# Altium PCB PCB1.PcbDoc
Units mm, origin at the board's own origin, x right, y up, seen from the top; angles counter-clockwise.
Board outline 227.36 x 30 mm, 2 copper layers (Top Layer, Bottom Layer), stack 1.569 mm thick; 50 components, 57 nets, 198 pads, 235 vias.
Unrouted connection lines stored in the file: 1.
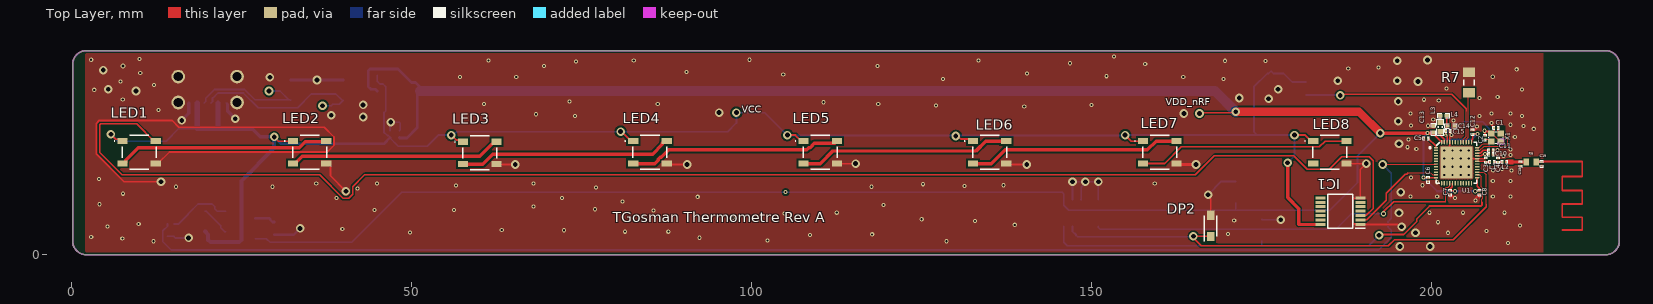
[diagram p0: Top Layer view]
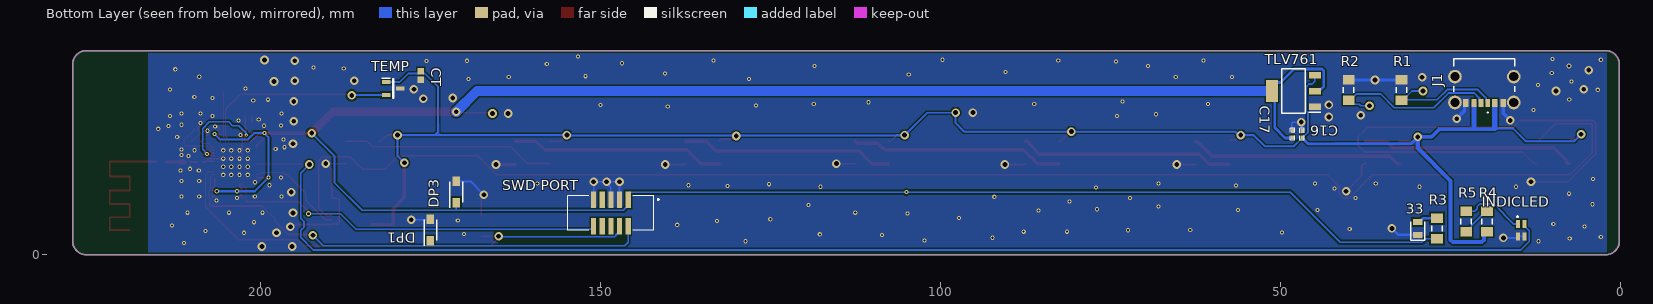
[diagram p1: Bottom Layer view, seen from below]
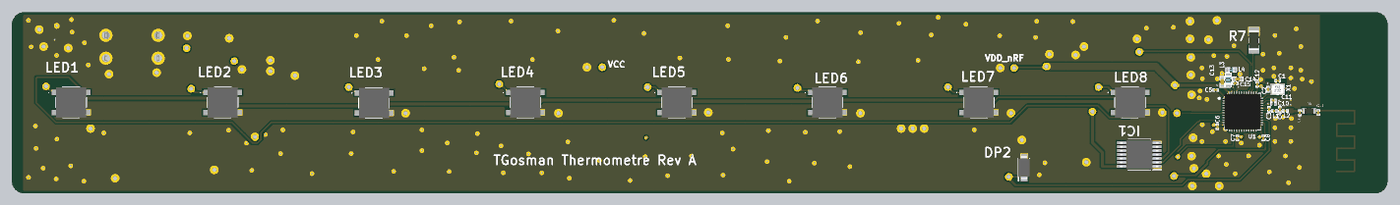
[diagram p2: 3D render of the assembled board from above, using the file's embedded part models]
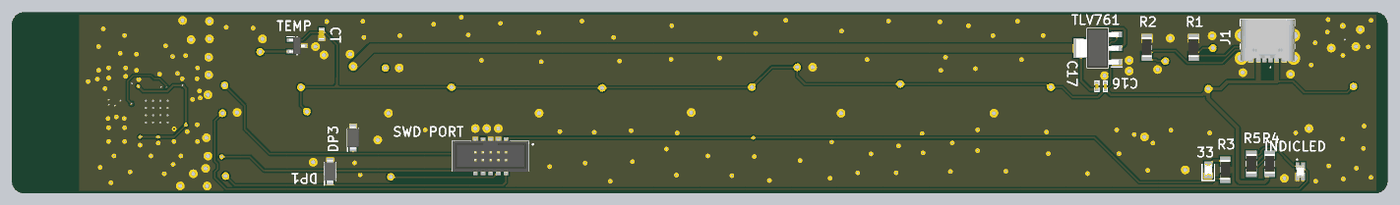
[diagram p3: 3D render of the assembled board from below, using the file's embedded part models]

## Layer stack, top to bottom
Top Solder: solder mask 0.0254, SM-001, Dk 4
Top Layer: signal copper 0.035
Dielectric 1: core 1.4986, Core-043, Dk 4.3
Bottom Layer: signal copper 0.035
Bottom Solder: solder mask 0.0254, SM-001, Dk 4

## Board outline
0.222,1.94 0.222,27.94 cw(c2.222,27.94) 2.222,29.94 225.584,29.94 cw(c225.584,27.94) 227.584,27.94 227.584,1.94 cw(c225.584,1.94) 225.584,-0.06 2.222,-0.06 cw(c2.222,1.94)

## Design rules (kind name [scope] priority, off if disabled: settings)
BoardOutlineClearance [All] p1: gap=0.2 ignorepadtopadclearanceinfootprint=FALSE
Clearance Clearance_3 [All] p1: gap=0.254 ignorepadtopadclearanceinfootprint=FALSE
Clearance Clearance_2 [All] p2: gap=0.254 ignorepadtopadclearanceinfootprint=FALSE except(0: Arc-Hole Track-Hole SMDPad-Hole THPad-Hole Via-Hole Fill-Hole Poly-Hole Region-Hole Text-Hole)
Clearance Clearance_1 [All] p3: gap=0.254 ignorepadtopadclearanceinfootprint=FALSE except(0: Arc-Hole Track-Hole SMDPad-Hole THPad-Hole Via-Hole Fill-Hole Poly-Hole Region-Hole Text-Hole)
Clearance [All] p4: gap=0.254 ignorepadtopadclearanceinfootprint=FALSE except(0: Arc-Hole Track-Hole SMDPad-Hole THPad-Hole Via-Hole Fill-Hole Poly-Hole Region-Hole Text-Hole)
Clearance ClearanceMidLayer1 [OnLayer('Mid Layer 1') Or IsVia Or IsThruPin vs OnLayer('Mid Layer 1')] p5: gap=0.102 ignorepadtopadclearanceinfootprint=FALSE except(0.127: Arc-Via Track-Via SMDPad-Via THPad-Via Via-Via Via-Fill Via-Poly Via-Region Via-Text; 0.25: Arc-Hole Track-Hole SMDPad-Hole THPad-Hole Via-Hole Fill-Hole Poly-Hole Region-Hole Text-Hole)
Clearance ClearanceTopLayer [OnLayer('Top Layer') Or IsVia Or IsThruPin vs OnLayer('Top Layer') Or IsVia Or IsThruPin] p6: gap=0.203 ignorepadtopadclearanceinfootprint=FALSE except(0.25: Arc-Hole Track-Hole SMDPad-Hole THPad-Hole Via-Hole Fill-Hole Poly-Hole Region-Hole Text-Hole)
Clearance ClearanceBottomLayer [OnLayer('Bottom Layer') Or IsVia Or IsThruPin vs OnLayer('Bottom Layer') Or IsVia Or IsThruPin] p7: gap=0.203 ignorepadtopadclearanceinfootprint=FALSE except(0.25: Arc-Hole Track-Hole SMDPad-Hole THPad-Hole Via-Hole Fill-Hole Poly-Hole Region-Hole Text-Hole)
Clearance ClearanceMidLayer2 [OnLayer('Mid Layer 2') Or IsVia Or IsThruPin vs OnLayer('Mid Layer 2')] p8: gap=0.102 ignorepadtopadclearanceinfootprint=FALSE except(0.127: Arc-Via Track-Via SMDPad-Via THPad-Via Via-Via Via-Fill Via-Poly Via-Region Via-Text; 0.25: Arc-Hole Track-Hole SMDPad-Hole THPad-Hole Via-Hole Fill-Hole Poly-Hole Region-Hole Text-Hole)
ComponentClearance [All] p1: gap=0.102 collisioncheckmode=3 verticalgap=0.102 showdistances=TRUE
DiffPairsRouting [All] p1: maxlimit=0.203 minlimit=0.203 mostfreqgap=0.203 toplayer_minwidth=0.203 toplayer_maxwidth=1816.048 toplayer_prefwidth=0.203 bottomlayer_minwidth=0.203 bottomlayer_maxwidth=1816.048 bottomlayer_prefwidth=0.203 maxuncoupledlength=12.7
Height [All] p1: minheight=0 maxheight=1816.048 prefheight=12.7
HoleSize [All] p1: absolutevalues=TRUE maxlimit=6.3 minlimit=0.2 maxpercent=80.000 minpercent=20.000
HoleToHoleClearance [All] p1: gap=0.25 allowstackedmicrovias=FALSE
MinimumAnnularRing [All] p1: minimumring=0.076
MinimumSolderMaskSliver [All] p1: minsoldermaskwidth=0
PlaneClearance PlaneClearanceMidLayer1 [OnLayer('Mid Layer 1')] p1: clearance=0.102
PlaneClearance PlaneClearanceMidLayer2 [OnLayer('Mid Layer 2')] p2: clearance=0.102
PlaneClearance PlaneClearanceTopLayer [OnLayer('Top Layer')] p3: clearance=0.203
PlaneClearance PlaneClearanceBottomLayer [OnLayer('Bottom Layer')] p4: clearance=0.203
PlaneConnect PlaneConnectPowerPads [InPadClass('PowerPads')] p1: planeconnectstyle=Direct reliefexpansion=0.508 reliefentries=4 reliefconductorwidth=0.254 reliefairgap=0.254
PlaneConnect PlaneConnectTopLayer [OnLayer('Top Layer')] p2: planeconnectstyle=Direct reliefexpansion=0.3 reliefentries=4 reliefconductorwidth=0.203 reliefairgap=0.203
PlaneConnect PlaneConnectBottomLayer [OnLayer('Bottom Layer')] p3: planeconnectstyle=Direct reliefexpansion=0.3 reliefentries=4 reliefconductorwidth=0.203 reliefairgap=0.203
PlaneConnect PlaneConnectMidLayer1 [OnLayer('Mid Layer 1')] p4: planeconnectstyle=Direct reliefexpansion=0.3 reliefentries=4 reliefconductorwidth=0.102 reliefairgap=0.102
PlaneConnect PlaneConnectMidLayer2 [OnLayer('Mid Layer 2')] p5: planeconnectstyle=Direct reliefexpansion=0.3 reliefentries=4 reliefconductorwidth=0.102 reliefairgap=0.102
PolygonConnect PolygonConnect_2 [All vs IsNamedPolygon('NONET_L-01_P-001')] p1: connectstyle=Direct reliefconductorwidth=0.254 reliefentries=4 polygonreliefangle="90 Angle" airgapwidth=0.254
PolygonConnect PolygonConnect_1 [All vs IsNamedPolygon('Bottom_Layer-GND') Or IsNamedPolygon('NONET_L-01_P-001') Or IsNamedPolygon('NONET_L-01_P-001') Or IsNamedPolygon('NONET_L-01_P-001')] p2: connectstyle=Direct reliefconductorwidth=0.254 reliefentries=4 polygonreliefangle="90 Angle" airgapwidth=0.254
PolygonConnect [All vs IsNamedPolygon('Top_Layer-GND')] p3: connectstyle=Direct reliefconductorwidth=0.254 reliefentries=4 polygonreliefangle="90 Angle" airgapwidth=0.254
PolygonConnect PolygonConnectPowerPads [All vs (InPadClass('PowerPads'))] p4: connectstyle=Direct reliefconductorwidth=0.254 reliefentries=4 polygonreliefangle="90 Angle" airgapwidth=0.254
PolygonConnect PolygonConnectMidLayer1 [OnLayer('Mid Layer 1') vs OnLayer('Mid Layer 1')] p5: thpad.connectstyle=NoConnect thpad.reliefconductorwidth=0.102 thpad.reliefentries=4 thpad.polygonreliefangle="90 Angle" thpad.airgapwidth=0.102 smdpad.connectstyle=Direct smdpad.reliefconductorwidth=0.102 smdpad.reliefentries=4 smdpad.polygonreliefangle="90 Angle" smdpad.airgapwidth=0.102 via.connectstyle=Direct via.reliefconductorwidth=0.127 via.reliefentries=4 via.polygonreliefangle="90 Angle" via.airgapwidth=0.127
PolygonConnect PolygonConnectMidLayer2 [OnLayer('Mid Layer 2') vs OnLayer('Mid Layer 2')] p6: thpad.connectstyle=Relief thpad.reliefconductorwidth=0.102 thpad.reliefentries=4 thpad.polygonreliefangle="90 Angle" thpad.airgapwidth=0.102 smdpad.connectstyle=Relief smdpad.reliefconductorwidth=0.102 smdpad.reliefentries=4 smdpad.polygonreliefangle="90 Angle" smdpad.airgapwidth=0.102 via.connectstyle=Direct via.reliefconductorwidth=0.127 via.reliefentries=4 via.polygonreliefangle="90 Angle" via.airgapwidth=0.127
PolygonConnect PolygonConnectTopLayer [OnLayer('Top Layer') vs OnLayer('Top Layer')] p7: thpad.connectstyle=Relief thpad.reliefconductorwidth=0.203 thpad.reliefentries=4 thpad.polygonreliefangle="90 Angle" thpad.airgapwidth=0.203 smdpad.connectstyle=Relief smdpad.reliefconductorwidth=0.203 smdpad.reliefentries=4 smdpad.polygonreliefangle="90 Angle" smdpad.airgapwidth=0.203 via.connectstyle=Direct via.reliefconductorwidth=0.127 via.reliefentries=4 via.polygonreliefangle="90 Angle" via.airgapwidth=0.127
PolygonConnect PolygonConnectBottomLayer [OnLayer('Bottom Layer') vs OnLayer('Bottom Layer')] p8: thpad.connectstyle=Relief thpad.reliefconductorwidth=0.203 thpad.reliefentries=4 thpad.polygonreliefangle="90 Angle" thpad.airgapwidth=0.203 smdpad.connectstyle=Relief smdpad.reliefconductorwidth=0.203 smdpad.reliefentries=4 smdpad.polygonreliefangle="90 Angle" smdpad.airgapwidth=0.203 via.connectstyle=Direct via.reliefconductorwidth=0.127 via.reliefentries=4 via.polygonreliefangle="90 Angle" via.airgapwidth=0.127
RoutingVias [All] p1: holewidth=0.2 width=0.45 viastyle="Through Hole" minholewidth=0.2 minwidth=0.45 maxholewidth=6.3 maxwidth=6.55
ShortCircuit ShortCircuit_Bottom [OnLayer('Bottom Layer') vs OnLayer('Bottom Layer')] p1: allowed=FALSE
ShortCircuit ShortCircuit_Top [OnLayer('Top Layer') vs OnLayer('Top Layer')] p2: allowed=FALSE
SilkToSilkClearance [All] p1: silktosilkclearance=0
SilkToSolderMaskClearance [IsPad] p1: minsilkscreentomaskgap=0.102 clearancetoexposedcopper=TRUE
SolderMaskExpansion [All] p1: expansion=0.075 istentingtop=FALSE soldermaskfromhole=TRUE
ViasUnderSMD [All] p1: allowed=TRUE
Width [All] p1: maxlimit=1816.048 minlimit=0.203 preferedwidth=0.203 minimp=50.000000 maximp=50.000000 favimp=50.000000
19 further rules are at their usual default settings.

## Classes and differential pairs
component class BluetoothSchematic: 33 C1 C2 C3 C4 C5 C6 C7 C8 C10 C11 C12 C13 C14 C15 C18 C19 CT DP1 DP2 DP3 IC1 INDICLED J1 L1 L2 L3 L4 LED1 LED2 LED3 LED4 LED5 LED6 LED7 LED8 R1 R2 R3 R4 R5 R7 "SWD PORT" TEMP TLV761 U1 X1

## Components (designator, comment, footprint, x,y, rotation, side; value= is the part's Value field where it differs from the comment)
33 "APT2012CGCK" LEDC2012X50N 29.845,3.81 r90 bottom
C1 "12pF" CAPC0603X03L_C#1 209.458,18.599 r180 top
C2 "12pF" CAPC0603X03L_C#1 207.833,17.174 r90 top
C3 "1.0pF" CAPC0603X03L_C#1 207.983,13.874 r270 top
C4 "1.2pF" CAPC0603X03L_C#2 209.783,13.874 r270 top
C5 "100nF" CAPC0603X03L_C#3 199.183,17.075 r180 top
C6 "100nF" CAPC0603X03L_C#3 199.468,10.974 r270 top
C7 "100nF" CAPC0603X03L_C#3 202.757,9.074 r270 top
C8 "100nF" CAPC0603X03L_C#3 207.056,9.074 r270 top
C10 "N.C." CAPC0603X03L_C_NC 208.702,14.744 r180 top
C11 "100pF" CAPC0603X03L_C#1 208.702,15.328 r0 top
C12 "100nF" CAPC0603X03L_C#3 206.058,17.974 r90 top
C13 "1.0µF" CAPC1005X04L 200.258,18.399 r90 top
C14 "1.0µF" CAPC1005X04L 202.832,18.864 r180 top
C15 "47nF" CAPC0603X03L_C#1 202.407,18.164 r0 top
C16 "1.0µF" CAPC1005X04L 46.863,17.653 r90 bottom
C17 "1.0µF" CAPC1005X04L 48.26,17.661 r90 bottom
C18 "N.C" CAPC0603X03L_C#1 213.106,13.289 r90 top value=1.2pF
C19 "1.5pF" CAPC0603X03L_C#1 216.154,13.304 r90 top value=1.2pF
CT "Capacitor 100 nF +/-10% 50 V 0603" CAPC1608X90X40NL10T20 176.403,26.299 r270 bottom value=100nF
DP1 "SMF3.3" SOD3718X108N 175.006,3.556 r90 bottom
DP2 "SMF3.3" SOD3718X108N 167.513,4.191 r90 top
DP3 "SMF3.3" SOD3718X108N 171.196,9.144 r90 bottom
IC1 "74AHC125PW,118" SOP65P640X110-14N 186.563,6.35 r180 top
INDICLED "APHBM2012SURKCGKC" APHBM2012SURKCGKC 14.638,3.545 r90 bottom
J1 "217175-0001" 2171750001 20.066,25.273 r0 bottom locked
L1 "4.7nH" INDC0603X03L_C 208.883,13.574 r0 top
L2 "2.2nH" INDC0603X03L_C 210.683,13.574 r0 top
L3 "10µH" INDC1608X06L 201.258,18.699 r270 top
L4 "15nH" INDC1005X04L 201.758,20.399 r180 top
LED1 "WS2812B-V5" WS2812BV5 10,15 r0 top
LED2 "WS2812B-V5" WS2812BV5 35.052,14.986 r0 top
LED3 "WS2812B-V5" WS2812BV5 60.056,14.901 r0 top
LED4 "WS2812B-V5" WS2812BV5 85.09,14.986 r0 top
LED5 "WS2812B-V5" WS2812BV5 110.109,14.986 r0 top
LED6 "WS2812B-V5" WS2812BV5 135.001,14.986 r0 top
LED7 "WS2812B-V5" WS2812BV5 160.02,14.986 r0 top
LED8 "WS2812B-V5" WS2812BV5 185.039,14.986 r0 top
R1 "Resistor 0R +/- 0.05% 1206 250 mW" RESC3116X70X50ML13T20 32.258,24.13 r90 bottom value=5K1
R2 "Resistor 0R +/- 0.05% 1206 250 mW" RESC3116X70X50ML13T20 40.005,24.13 r90 bottom value=5K1
R3 "Resistor 0R +/- 0.05% 1206 250 mW" RESC3116X70X50ML13T20 27.051,3.81 r90 bottom value=200
R4 "Resistor 0R +/- 0.05% 1206 250 mW" RESC3116X70X50ML13T20 19.685,4.826 r90 bottom value=200
R5 "Resistor 0R +/- 0.05% 1206 250 mW" RESC3116X70X50ML13T20 22.733,4.826 r90 bottom value=200
R6 "Resistor 0R +/- 5% 0603 100 mW" RESC1608X55X25ML10T15 214.63,13.589 r0 top value=0
R7 "Resistor 0R +/- 0.05% 1206 250 mW" RESC3116X70X50ML13T20 205.486,25.273 r90 top value=5K1
"SWD PORT" "20021521-00010C4LF" AMPHENOL_20021521-00010C4LF 148.463,6.096 r0 bottom
TEMP "TMP236A2DBZR" SOT95P237X112-3N 180.467,24.384 r180 bottom
TLV761 "TLV76133DCYR" SOT230P700X180-4N 48.133,24.003 r0 bottom
U1 "nRF52840-QFAA" QFN40P600X600X90-48N 203.658,13.474 r0 top
X1 "32MHz" XTAL_2016_NT 209.458,17.174 r180 top

## Footprints (in the part's own frame and the unit in brackets; to place one, negate y for a bottom-side part, rotate by r counter-clockwise, add the part's x,y. Pads: shape width x height; smd on the part's side, far side on the other; paste and mask are expansions set on the pad)
2171750001 [mm]
  rect 0.7x1.2 smd: A5(-0.5,3.03) B5(0.5,3.03)
  rect 0.76x1.2 smd: A9(1.52,3.03) B9(-1.52,3.03)
  rect 0.8x1.2 smd: A12(2.75,3.03) B12(-2.75,3.03)
  round 2.01 hole 1.34: MH1(-4.32,-0.85) MH2(4.32,-0.85) MH3(-4.32,2.95) MH4(4.32,2.95)
  silkscreen extent -4.47,-3.45 4.47,4.5, body extent -4.47,-3.44 4.47,3.46, height 3.26
AMPHENOL_20021521-00010C4LF [mm]
  rect 0.76x2.4 smd: 01(-2.54,-1.95) 02(-2.54,1.95) 03(-1.27,-1.95) 04(-1.27,1.95) 05(0,-1.95) 06(0,1.95) 07(1.27,-1.95) 08(1.27,1.95) 09(2.54,-1.95) 10(2.54,1.95)
  silkscreen extent -7.07,-2.55 6.32,2.55, body extent -6.32,-2.75 6.32,2.75, height 5.6
APHBM2012SURKCGKC [mm]
  rect 1.2x0.6 smd: 1(0.9,0.475) 2(-0.9,0.475) 3(-0.9,-0.475) 4(0.9,-0.475)
  silkscreen extent 1.95,0.5 2.05,0.6, body extent -1,-0.63 1,0.63, height 0.46
CAPC0603X03L_C#1 [mm] "Chip Capacitor, 2-Leads, Body 0.6x0.3mm, IPC High Density"
  rect 0.27x0.3 smd: 1(-0.285,0) 2(0.285,0)
  silkscreen extent -0.49,-0.22 0.49,0.22, body extent -0.3,-0.15 0.31,0.15, height 0.3
CAPC0603X03L_C#2 [mm] "Chip Capacitor, 2-Leads, Body 0.6x0.3mm, IPC High Density"
  rect 0.27x0.3 smd: 1(-0.285,0) 33(0.285,0)
  silkscreen extent -0.49,-0.22 0.49,0.22, body extent -0.3,-0.15 0.31,0.15, height 0.3
CAPC0603X03L_C#3 [mm] "Chip Capacitor, 2-Leads, Body 0.6x0.3mm, IPC High Density"
  rect 0.27x0.3 smd mask+0.05: 1(-0.285,0) 2(0.285,0)
  silkscreen extent -0.49,-0.22 0.49,0.22, body extent -0.3,-0.15 0.31,0.15, height 0.3
CAPC0603X03L_C_NC [mm] "Chip Capacitor, 2-Leads, Body 0.6x0.3mm, IPC High Density"
  rect 0.27x0.3 smd mask+0.05: 1(-0.285,0) 2(0.285,0)
  silkscreen extent -0.49,-0.22 0.49,0.22
CAPC1005X04L [mm] "Chip Capacitor, 2-Leads, Body 1.0x0.5mm, IPC High Density"
  rect 0.6x0.5 smd: 1(-0.5,0) 2(0.5,0)
  silkscreen extent -0.9,-0.35 0.9,0.35, body extent -0.51,-0.25 0.51,0.25, height 0.5
CAPC1608X90X40NL10T20 [mm] "Chip Capacitor, 2-Leads, Body 1.70x0.90mm, IPC Medium Density"
  rect 0.95x0.95 smd: 1(-0.625,0) 2(0.625,0)
  body extent -0.85,-0.45 0.85,0.45, height 0.9
INDC0603X03L_C [mm] "Chip Inductor, 2-Leads, Body 0.6x0.3mm, IPC High Density"
  rect 0.27x0.3 smd: 1(-0.285,0) 2(0.285,0)
  silkscreen extent -0.49,-0.22 0.49,0.22, body extent -0.31,-0.16 0.31,0.16, height 0.26
INDC1005X04L [mm] "Chip Inductor, 2-Leads, Body 1.0x0.5mm, IPC High Density"
  rect 0.65x0.5 smd: 1(-0.475,0) 2(0.475,0)
  silkscreen extent -0.9,-0.35 0.9,0.35, body extent -0.5,-0.3 0.5,0.3, height 0.5
INDC1608X06L [mm] "Chip Inductor, 2-Leads, Body 1.6x0.8mm, IPC High Density"
  rect 0.75x0.8 smd: 1(-0.675,0) 2(0.675,0)
  silkscreen extent -1.17,-0.5 1.17,0.5, body extent -0.8,-0.48 0.8,0.48, height 0.8
LEDC2012X50N [mm]
  rect 0.9x1.4 smd: 1(-0.95,0) 2(0.95,0)
  silkscreen extent -1.75,-1.05 0.95,1.05, body extent -1,-0.63 1,0.63, height 0.4
QFN40P600X600X90-48N [mm] "QFN, 48-Leads, Body 6,0x6,0mm (max), Pitch 0,40mm, IPC Medium Density"
  oval 0.65x0.2 smd: 1(-3.025,2.2) 2(-3.025,1.8) 3(-3.025,1.4) 4(-3.025,1) 5(-3.025,0.6) 6(-3.025,0.2) 7(-3.025,-0.2) 8(-3.025,-0.6) 9(-3.025,-1) 10(-3.025,-1.4) 11(-3.025,-1.8) 12(-3.025,-2.2) 25(3.025,-2.2) 26(3.025,-1.8) 27(3.025,-1.4) 28(3.025,-1) 29(3.025,-0.6) 30(3.025,-0.2) 31(3.025,0.2) 32(3.025,0.6) 33(3.025,1) 34(3.025,1.4) 35(3.025,1.8) 36(3.025,2.2)
  oval 0.2x0.65 smd: 13(-2.2,-3.025) 14(-1.8,-3.025) 15(-1.4,-3.025) 16(-1,-3.025) 17(-0.6,-3.025) 18(-0.2,-3.025) 19(0.2,-3.025) 20(0.6,-3.025) 21(1,-3.025) 22(1.4,-3.025) 23(1.8,-3.025) 24(2.2,-3.025) 37(2.2,3.025) 38(1.8,3.025) 39(1.4,3.025) 40(1,3.025) 41(0.6,3.025) 42(0.2,3.025) 43(-0.2,3.025) 44(-0.6,3.025) 45(-1,3.025) 46(-1.4,3.025) 47(-1.8,3.025) 48(-2.2,3.025)
  rect 4.7x4.7 smd: 49(0,0)
  silkscreen extent -4.02,-3 3,3, body extent -3.02,-3.02 3.02,3.02, height 0.86
RESC1608X55X25ML10T15 [mm] "Chip Resistor, 2-Leads, Body 1.70x0.90mm, IPC Low Density"
  rect 0.8x1 smd: 1(-0.75,0) 2(0.75,0)
  body extent -0.85,-0.45 0.85,0.45, height 0.55
RESC3116X70X50ML13T20 [mm] "Chip Resistor, 2-Leads, Body 3.25x1.65mm, IPC Low Density"
  rect 1.4x1.75 smd: 1(-1.5,0) 2(1.5,0)
  silkscreen extent -0.4,-0.77 0.4,0.77, body extent -1.63,-0.82 1.63,0.82, height 0.7
SOD3718X108N [mm]
  rect 1.375x1.15 smd: 1(-1.575,0) 2(1.575,0)
  silkscreen extent -2.26,-0.92 1.5,0.92, body extent -1.95,-1 1.95,1, height 1.18
SOP65P640X110-14N [mm]
  rect 1.475x0.45 smd: 1(-2.938,1.95) 2(-2.938,1.3) 3(-2.938,0.65) 4(-2.938,0) 5(-2.938,-0.65) 6(-2.938,-1.3) 7(-2.938,-1.95) 8(2.938,-1.95) 9(2.938,-1.3) 10(2.938,-0.65) 11(2.938,0) 12(2.938,0.65) 13(2.938,1.3) 14(2.938,1.95)
  silkscreen extent -3.67,-2.5 1.85,2.52, body extent -3.2,-2.5 3.2,2.5, height 1.1
SOT95P237X112-3N [mm]
  rect 1.25x0.6 smd: 1(-1.05,0.95) 2(-1.05,-0.95) 3(1.05,0)
  silkscreen extent -1.68,-1.46 0.08,1.5, body extent -1.27,-1.46 1.27,1.46, height 1
SOT230P700X180-4N [mm]
  rect 1.75x0.95 smd: 1(-3.15,2.3) 2(-3.15,0) 3(-3.15,-2.3)
  rect 1.75x3.2 smd: 4(3.15,0)
  silkscreen extent -4.03,-3.25 1.75,3.25, body extent -3.5,-3.25 3.5,3.25, height 1.68
WS2812BV5 [mm]
  rect 1.5x0.9 smd: 1(-2.45,1.65) 2(-2.45,-1.65) 3(2.45,-1.65) 4(2.45,1.65)
  silkscreen extent -3.7,-2.5 2.5,2.5, body extent -2.5,-2.5 2.5,2.5, height 1.72
XTAL_2016_NT [mm] "Crystal 2.0 x 1.6 mm"
  rect 0.95x0.85 smd: 1(-0.725,-0.575) 2(-0.725,0.575) 2(0.725,-0.575) 3(0.725,0.575)
  Top Layer lines w0.225: 0.725,-0.575 0.575,-0.575 -0.575,0.575 -0.725,0.575
  Top Layer keep-out lines w0.01: -0.25,0.65 -0.25,1 -1.2,1 -1.2,0.15 -0.55,0.15
  silkscreen extent -1.08,-0.88 1.08,0.88, body extent -1.05,-0.85 1.05,0.85, height 0.56

## Part data
33: "LED", Manufacturer_Name=Kingbright, Mouser Part Number=604-APT2012CGCK, Arrow Part Number=APT2012CGCK, Arrow Price/Stock=https://www.arrow.com/en/products/apt2012cgck/kingbright, Datasheet Link=https://componentsearchengine.com/Datasheets/1/APT2012CGCK.pdf, Height=0.5mm, Manufacturer_Part_Number=APT2012CGCK, Mouser Price/Stock=https://www.mouser.co.uk/ProductDetail/Kingbright/APT2012CGCK?qs=VdjlWU%2FzoOEv1TxC2gMNzg%3D%3D
C1 C2: library part C0201-12p, "Capacitor, NP0, ±2%", Component Class=Capacitors, Footprint Doc=0201, LatestRevisionDate=2017-11-09, Pad Count=2, Part Number=C0201-12p, Published=2014-11-13
C3: library part C0201-1.0p, "Capacitor, NP0, ±10%", Component Class=Capacitors, Footprint Doc=0201, LatestRevisionDate=2018-10-22, Pad Count=2, Part Number=C0201-1.0p, Published=2014-11-13
C4 C18 C19: library part C0201-1.2p, "Capacitor, NP0, ±10%", Component Class=Capacitors, Footprint Doc=0201, LatestRevisionDate=2020-10-13, Pad Count=2, Part Number=C0201-1.2p, Published=2014-11-13
C5 C6 C7 C8 C12: library part C0201-100n, "Capacitor, X5R, ±10%", Component Class=Capacitors, Footprint Doc=0201, LatestRevisionDate=2017-11-09, Pad Count=2, Part Number=C0201-100n, Published=2014-11-13
C10: library part C0201-N.C., "Not mounted", Assembly="Not mounted", Component Class=Capacitors, Footprint Doc=0201, LatestRevisionDate=2014-11-13, Pad Count=2, Part Number=C0201-N.C., Published=2014-11-13
C11: library part C0201-100p, "Capacitor, NP0, ±5%", Component Class=Capacitors, Footprint Doc=0201, LatestRevisionDate=2019-04-16, Pad Count=2, Part Number=C0201-100p, Published=2019-04-16
C13 C14 C16 C17: library part C0402-1µ0, "Capacitor, X5R, ±10%", Component Class=Capacitors, Footprint Doc=0402, LatestRevisionDate=2016-08-22, Pad Count=2, Part Number=C0402-1µ0, Published=2009-05-08
C15: library part C0201-47n, "Capacitor, X5R, ±10%", Component Class=Capacitors, Footprint Doc=0201, LatestRevisionDate=2017-11-09, Pad Count=2, Part Number=C0201-47n, Published=2014-11-13
CT: library part CMP-001-00017-6, "Chip Capacitor, 100 nF, +/- 10%, 50 V, 0603 (1608 Metric)", Capacitor Type=Ceramic, Case/Package=0603, Max Operating Temperature=125°C, Min Operating Temperature=-55°C, Tolerance=10%, Voltage Rating=50V, Mounting Technology=SM, Pins=2, RoHS Compliant=True
DP1 DP2 DP3: "TVS Diode (Uni-directional)", Manufacturer_Name=LITTELFUSE, Mouser Part Number=576-SMF3.3, Arrow Part Number=SMF3.3, Arrow Price/Stock=https://www.arrow.com/en/products/smf3.3/littelfuse?region=nac, Datasheet Link=https://componentsearchengine.com/Datasheets/2/SMF3.3.pdf, Height=1.08mm, Manufacturer_Part_Number=SMF3.3, Mouser Price/Stock=https://www.mouser.co.uk/ProductDetail/Littelfuse/SMF3.3?qs=5LChGqRbrjutbyo%2F8EojOg%3D%3D
IC1: "Integrated Circuit", Manufacturer_Name=Nexperia, Mouser Part Number=771-AHC125PW118, Arrow Part Number=74AHC125PW,118, Arrow Price/Stock=https://www.arrow.com/en/products/74ahc125pw118/nexperia?region=nac, Datasheet Link=https://assets.nexperia.com/documents/data-sheet/74AHC_AHCT125.pdf, Height=1.1mm, Manufacturer_Part_Number=74AHC125PW,118, Mouser Price/Stock=https://www.mouser.co.uk/ProductDetail/Nexperia/74AHC125PW118?qs=P62ublwmbi8wF1xkzo8GYw%3D%3D
INDICLED: "LED", Manufacturer_Name=Kingbright, Mouser Part Number=604-BM2012SURKCGKC, Arrow Part Number=APHBM2012SURKCGKC, Arrow Price/Stock=https://www.arrow.com/en/products/aphbm2012surkcgkc/kingbright?region=nac, Datasheet Link=https://mouser.componentsearchengine.com/Datasheets/3/APHBM2012SURKCGKC.pdf, Height=0.45mm, Manufacturer_Part_Number=APHBM2012SURKCGKC, Mouser Price/Stock=https://www.mouser.co.uk/ProductDetail/Kingbright/APHBM2012SURKCGKC?qs=mWUXtl%252BhaIKZSpp3TSJ%2FQA%3D%3D
J1: "Connector", Manufacturer_Name=Molex, Mouser Part Number=538-217175-0001, Datasheet Link=https://www.molex.com/pdm_docs/sd/2171750001_sd.pdf, Height=3.46mm, Manufacturer_Part_Number=217175-0001, Mouser Price/Stock=https://www.mouser.co.uk/ProductDetail/Molex/217175-0001?qs=DRkmTr78QARWJMiqNnldSg%3D%3D
L1: library part L0201-4n7, "High frequency chip inductor ±5%", Component Class=Inductors, Footprint Doc=0201, LatestRevisionDate=2013-04-10, Pad Count=2, Part Number=L0201-4n7, Published=2013-04-10
L2: library part L0201-2n2, "High frequency chip inductor ±5%", Component Class=Inductors, Footprint Doc=0201, LatestRevisionDate=2013-04-10, Pad Count=2, Part Number=L0201-2n2, Published=2013-04-10
L3: library part L0603-10µ-TDK, "Chip inductor, IDC,min = 50 mA, ±20%", Component Class=Inductors, Footprint Doc=0603, LatestRevisionDate=2012-09-19, Pad Count=2, Part Number=L0603-10µ-TDK, Published=2019-05-06
L4: library part L0402-15n, "High frequency chip inductor ±10%", Component Class=Inductors, Footprint Doc=0402, LatestRevisionDate=2012-09-19, Pad Count=2, Part Number=L0402-15n, Published=2010-07-12
LED1 LED2 LED3 LED4 LED5 LED6 LED7 LED8: "LED", Manufacturer_Name=Worldsemi, Datasheet Link=https://www.tme.com/Document/64e8d425b90f84990264129a9679149c/WS2812B-V5.pdf, Height=1.62mm, Manufacturer_Part_Number=WS2812B-V5
R1 R2 R3 R4 R5 R7: library part CMP-009-00008-5, "Chip Resistor, 0 Ohm, 0.25 W, -55 to 155 degC, 1206 (3216 Metric)", Case/Package=1206, Max Operating Temperature=155°C, Min Operating Temperature=-55°C, Power=250mW, Tolerance=0.05%, Voltage Rating=200V, Mounting Technology=SM, Pins=2, RoHS Compliant=True
R6: library part CMP-009-00006-5, "Chip Resistor, 0 Ohm, 0.1 W, -55 to 155 degC, 0603 (1608 Metric)", Case/Package=0603, Max Operating Temperature=155°C, Min Operating Temperature=-55°C, Power=100mW, Tolerance=5%, Voltage Rating=50V, Mounting Technology=SM, Pins=2, RoHS Compliant=True
"SWD PORT": library part CMP-002-00073-1, "Minitek127Â®, Shrouded Board to Board Header, Surface Mount, 10 positions, 1.27mm (0.500in) pitch.", Case/Package=None, Check_prices=https://www.snapeda.com/parts/20021521-00010C4LF/Amphenol/view-part/?ref=eda, Component Type=Standard, Design Item ID=20021521-00010C4LF, Digi-Key_Part_Number=609-6445-2-ND, MF="AMPHENOL ICC / FCI", MP=20021521-00010C4LF, Pins=10, Purchase-URL=https://pricing.snapeda.com/search/part/20021521-00010C4LF/?ref=eda, SnapEDA_Link=https://www.snapeda.com/parts/20021521-00010C4LF/Amphenol/view-part/?ref=snap, Source=20021521-00010C4LF.SchLib
TEMP: "Undefined or Miscellaneous", Manufacturer_Name="Texas Instruments", Mouser Part Number=595-TMP236A2DBZR, Arrow Part Number=TMP236A2DBZR, Arrow Price/Stock=https://www.arrow.com/en/products/tmp236a2dbzr/texas-instruments?region=nac, Datasheet Link=http://www.ti.com/lit/gpn/tmp236, Height=1.12mm, Manufacturer_Part_Number=TMP236A2DBZR, Mouser Price/Stock=https://www.mouser.co.uk/ProductDetail/Texas-Instruments/TMP236A2DBZR?qs=lc2O%252BfHJPVanftlPgPUvow%3D%3D
TLV761: "Integrated Circuit", Manufacturer_Name="Texas Instruments", Mouser Part Number=595-TLV76133DCYR, Arrow Part Number=TLV76133DCYR, Arrow Price/Stock=https://www.arrow.com/en/products/tlv76133dcyr/texas-instruments?region=nac, Datasheet Link=https://www.ti.com/lit/ds/symlink/tlv761.pdf?ts=1679984111185&ref_url=https%253A%252F%252Fwww.ti.com%252Fsitesearch%252Fen-us%252Fdocs%252Funiversalsearch.tsp%253FlangPref%253Den-US%2526searchTerm%253DTLV76133DCYR%2526nr%253D2, Height=1.8mm, Manufacturer_Part_Number=TLV76133DCYR, Mouser Price/Stock=https://www.mouser.co.uk/ProductDetail/Texas-Instruments/TLV76133DCYR?qs=9vOqFld9vZV5BPjUhjTZUA%3D%3D
U1: "Multi-protocol Bluetooth Low Energy, IEEE 802.15.4, ANT and 2.4GHz proprietary system-on-chip", Component Class=nRF_Devices, Footprint Doc=QFN-48, LatestRevisionDate=2016-11-22, Pad Count=48, Part Number=nRF52840-QFAA, Published=2016-03-31
X1: library part XTAL_SMD2016_32MHz_8pF_General_NT, "XTAL SMD 2016, 32MHz, Cl=8pF, Total Tol: ±30ppm", Component Class=Oscillators, Footprint Doc=XTAL_2016, LatestRevisionDate=2021-04-08, Pad Count=4, Part Number=XTAL_SMD2016_32MHz_8pF_General_NT, Published=2021-04-08

## Via types
v1: diameter 0.61, hole 0.305, Top Layer to Bottom Layer, 143 vias
v2: diameter 1.27, hole 0.711, Top Layer to Bottom Layer, 64 vias
v3: diameter 0.66, hole 0.33, Top Layer to Bottom Layer, tented both sides, 16 vias
v4: diameter 0.61, hole 0.305, Top Layer to Bottom Layer, tented both sides, 8 vias
v5: diameter 0.8, hole 0.4, Top Layer to Bottom Layer, 2 vias
v6: diameter 0.61, hole 0.305, Top Layer to Bottom Layer, tented top, 1 vias
v7: diameter 0.46, hole 0.2, Top Layer to Bottom Layer, tented both sides, 1 vias

## Nets (pads, with @x,y where several pads share a name; then routed paths per layer and width w, separated by ;. In a path a pad name is that pad's centre, name@x,y a point inside that pad or via, vN(x,y) a via of type N, cw(c..) or ccw(c..) an arc to the next point about the centre after c; other vN are vias at no path point)
ANT: C19.2 R6.2 | length 1
  Top Layer w0.4: R6.2 215.399,13.608 216.408,13.608
DEC1: C5.1 U1.1 | length 1.9
  Top Layer w0.2: C5.1 199.468,17.06 199.503,17.025 199.518,17.025 200.586,15.957 200.586,15.674 U1.1
DEC3: C11.1 U1.34 | length 1.9
  Top Layer w0.2: U1.34 207.151,14.874 207.604,15.327 C11.1@208.397,15.327
DEC4_6: C10.2 C14.2 C15.1 L4.1 U1.33 U1.46 | length 17.7
  Top Layer w0.2: C14.2@202.233,18.864 L4.1 L4.1@202.258,20.374 ; U1.46 202.258,17.325 v7(202.057,17.526) 202.089,17.558 202.089,18.139 202.115,18.164 202.115,18.646 C14.2 ; U1.33 207.278,14.474 207.548,14.744 C10.2
  Bottom Layer w0.2: v7(202.057,17.526) 202.084,17.553 202.084,17.807 203.2,18.923 204.089,18.923 204.621,19.455 207.494,19.455 208.483,18.466 208.483,15.416 v4(207.839,14.772)
GND: 33.1 "SWD PORT.03" "SWD PORT.05" "SWD PORT.09" C1.2 C2.2 C3.1 C4.1 C5.2 C6.2 C7.2 C8.2 C10.1 C11.2 C12.2 C13.2 C14.1 C15.2 C16.2 C17.2 C18.1 C19.1 CT.2 DP1.2 DP2.2 DP3.2 IC1.1 IC1.7 INDICLED.2 INDICLED.3 J1.A12 J1.B12 J1.MH1 J1.MH2 J1.MH3 J1.MH4 LED1.3 LED2.3 LED3.3 LED4.3 LED5.3 LED6.3 LED7.3 LED8.3 R1.2 R2.2 R7.2 TEMP.3 TLV761.1 U1.32 U1.45 U1.49 X1.2 | length 183.2
  Top Layer w0.229: U1.49@202.658,14.569 U1.45 202.658,17.24 202.883,17.465 v4@202.883,17.749 ; C15.2@202.743,18.164 202.743,17.7 202.904,17.539 v4(202.929,17.539) ; 202.783,8.324 202.757,8.349 C7.2 202.793,8.789 203.327,8.255 v1(203.408,8.255) ; U1.49@205.058,14.074 207.889,14.074 C3.1@207.974,14.159 ; 206.083,18.724 206.058,18.699 C12.2 206.322,18.259 206.556,18.493 206.556,18.723 v1(206.629,18.796) ; v1(206.424,7.912) 206.497,7.985 206.497,8.298 206.664,8.466 206.697,8.466 207.02,8.789 C8.2 207.056,8.349 207.03,8.324 ; C2.2 207.833,18.1 v4(207.772,18.161) 207.875,18.161 207.976,18.06 X1.2@208.422,18.06 ; X1.2@208.733,17.749 209.173,18.189 C1.2
  Top Layer w0.254: LED1.3 12.75,13.35 14.451,15.051 37.656,15.051 38.633,16.028 38.633,17.244 37.208,18.669 15.835,18.669 14.819,19.685 4.129,19.685 3.683,19.239 3.683,14.76 7.775,10.668 v2(13.208,10.668) ; LED2.3 37.802,13.336 38.125,13.013 38.125,11.532 v2(40.386,9.271) ; LED3.3 62.549,13.208 v2(65.278,13.208) ; LED4.3 87.668,13.208 v2(90.551,13.208) ; LED5.3 LED5.3 v2(115.316,13.335) ; LED6.3 137.579,13.208 v2(140.462,13.208) ; LED7.3 LED7.3@162.598,13.208 ; v2(167.132,8.763) 167.132,8.488 167.513,8.107 DP2.2 ; LED8.3 LED8.3 v2(190.373,13.335) 189.501,12.463 IC1.7 189.457,8.256 188.606,8.256 188.382,8.033 188.382,4.667 188.606,4.444 189.457,4.444 IC1.1 194.969,4.4 195.305,4.064 v2(195.58,4.064) ; v1(208.808,19.324) 208.876,19.256 208.876,18.911 209.173,18.614 C1.2
  Top Layer w0.5: LED7.3@162.598,13.208 v2(165.354,13.208)
  Bottom Layer w0.254: INDICLED.3 INDICLED.2 15.113,2.586 15.286,2.413 v2(17.272,2.413) ; J1.B12@17.272,22.199 J1.B12 ; J1.A12 J1.A12@22.987,22.072 ; C16.2 46.863,19.304 v2(46.99,19.431) 48.238,19.431 48.387,19.282 48.387,18.774 48.383,18.77 48.383,18.284 C17.2 ; 147.193,8.046 v2(147.193,10.668) ; v2@147.256,10.604 147.32,10.668 v2(149.098,10.668) ; 148.463,8.046 148.486,8.069 148.486,9.843 149.098,10.455 v2(149.098,10.668) ; 151.003,8.046 v2(151.003,10.668) v2(149.098,10.668) ; v2(167.132,8.763) 169.088,10.719 DP3.2 ; DP1.2 175.057,5.08 v2(177.8,5.08)
  Bottom Layer w0.4: 33.1 32.705,2.86 v2(33.655,3.81) ; R1.2 R2.2
  Bottom Layer w0.5: v2(16.256,19.685) 17.294,20.723 17.294,22.177 J1.B12@17.272,22.199 ; J1.A12@22.987,22.072 22.987,21.082 v2(24.13,19.939)
  other v1: 211.227,1.674 12.091,1.928 128.677,1.928 102.388,2.055 7.519,2.309 92.355,2.436 2.947,2.563 108.601,2.853 117.755,2.944 170.032,2.997 202.411,3.163 49.81,3.198 81.433,3.325 87.783,3.325 208.052,3.452 72.473,3.537 63.301,3.574 39.862,3.73 5.36,4.087 213.005,4.214 138.71,4.341 9.932,4.468 200.94,4.722 132.854,4.922 170.968,4.976 125.028,5.162 97.308,5.357 104.882,6.023 112.548,6.119 199.67,6.119 204.623,6.119 210.719,6.119 85.601,6.453 44.603,6.5 56.287,6.5 76.988,6.627 67.971,7.008 119.406,7.262 4.191,7.366 81.052,7.77 38.993,8.257 72.162,8.278 92.101,8.458 196.908,8.524 200.808,8.524 208.983,8.524 211.608,8.524 7.646,8.913 42.088,9.675 77.149,9.83 15.393,9.929 29.617,9.929 117.628,9.929 131.344,10.056 56.592,10.092 137.033,10.16 198.628,10.16 125.248,10.31 36.033,10.387 44.984,10.437 67.971,10.437 159.284,10.437 200.783,10.599 208.983,10.799 211.608,10.799 4.09,11.072 196.964,11.29 209.042,12.319 211.709,12.319 210.312,12.573 197.739,15.494 196.469,15.748 196.596,16.891 212.217,17.272 215.007,18.452 213.474,18.859 199.433,18.899 196.977,18.923 211.608,19.049 203.208,19.674 200.233,19.799 74.041,20.32 207.01,20.32 213.259,20.343 68.352,20.597 196.908,20.724 208.808,20.724 211.608,20.724 12.827,21.209 140.107,21.74 127.153,21.867 149.987,21.971 60.706,22.098 86.233,22.098 118.644,22.121 110.617,22.352 73.279,22.479 201.041,22.606 198.882,22.733 7.587,22.783 207.01,22.987 209.703,23.137 3.397,24.185 213.269,24.252 202.184,24.384 12.192,24.892 128.143,25.781 169.418,25.781 65.431,26.058 163.475,26.058 57.141,26.09 208.975,26.106 152.172,26.185 104.674,26.439 140.488,26.566 10.16,26.67 90.45,26.82 212.497,27.201 187.732,27.328 192.177,27.455 69.495,27.709 118.517,27.709 157.887,27.963 146.838,28.09 74.194,28.344 175.547,28.4 169.593,28.449 61.367,28.471 82.703,28.471 133.376,28.471 2.947,28.598 99.711,28.606 10.059,28.725 153.315,29.106
  other v2: 195.326,1.143 199.771,1.143 197.612,3.175 195.199,6.096 195.453,9.144 195.199,16.256 195.072,19.558 42.926,20.193 38.227,20.447 163.576,20.701 95.25,20.828 42.926,21.971 195.072,22.479 176.022,22.86 171.704,22.987 9.525,24.003 5.461,24.257 177.419,24.257 197.993,25.4 186.182,25.527 194.945,25.527 36.131,25.63 29.21,26.035 4.725,27.074 194.945,28.448 199.39,28.575
  other v3: 201.858,11.674 203.058,11.674 204.258,11.674 205.458,11.674 201.858,12.874 203.058,12.874 204.258,12.874 205.458,12.874 201.858,14.074 203.058,14.074 204.258,14.074 205.458,14.074 201.858,15.274 203.058,15.274 204.258,15.274 205.458,15.274
  other v4: 210.566,14.478 211.582,14.605 209.667,15.303 211.583,15.424
  other v5: 7.62,27.686
  other v6: 7.265,25.423
LEDDIN: IC1.3 LED1.4 | length 217.8
  Top Layer w0.254: LED1.4 12.15,16.65 9.623,19.177 4.34,19.177 4.191,19.028 4.191,14.97 7.477,11.684 36.536,11.684 39.965,8.255 40.807,8.255 41.402,8.85 41.402,9.959 43.127,11.684 165.267,11.684 168.061,14.478 179.708,14.478 181.681,12.505 184.919,12.505 186.765,14.351 190.794,14.351 191.389,13.756 191.389,6.737 190.396,5.744 189.545,5.744 IC1.3
Net33_2: 33.2 R3.2 | length 3
  Bottom Layer w0.4: R3.2 29.045,5.31 29.595,4.76 33.2
NetC3_2: C3.2 L1.1 U1.31 | length 1.9
  Top Layer w0.229: U1.31@206.733,13.674 207.889,13.674 207.974,13.589 207.989,13.574 L1.1
NetC4_2: L1.2 L2.1 | length 1.2
  Top Layer w0.229: L1.2 L2.1
NetINDICLED_1: INDICLED.1 R5.2 | length 9.5
  Bottom Layer w0.254: INDICLED.1 15.762,4.445 17.207,5.89 17.207,5.962 18.652,7.407 20.718,7.407 21.097,7.027 21.097,6.706 21.477,6.326 R5.2
NetJ1_A5: J1.A5 R1.1 | length 17.9
  Bottom Layer w0.254: J1.A5 19.789,22.466 19.789,22.955 21.053,24.219 25.532,24.219 27.032,22.719 R1.1@31.994,22.719 ; v2(29.083,24.003) 30.71,24.003 R1.1@31.994,22.719 ; R1.1 32.169,22.719 R1.1@31.994,22.719
NetJ1_B5: J1.B5 R2.1 | length 25.8
  Bottom Layer w0.254: J1.B5 20.789,22.466 20.789,22.965 21.535,23.711 25.321,23.711 27.483,21.549 33.291,21.549 35.304,23.562 38.898,23.562 39.83,22.63 R2.1 39.432,22.057 38.448,22.057 38.235,21.844 v2(36.957,21.844)
NetL3_1: L3.1 L4.2 | length 1
  Top Layer w0.2: L3.1 201.258,20.374 L4.2
NetL3_2: L3.2 U1.47 | length 1.8
  Top Layer w0.2: L3.2 201.258,17.519 201.858,16.919 U1.47
NetLED1_2: LED1.2 LED2.4 | length 31.5
  Top Layer w0.5: LED1.2 7.85,13.35 8.05,13.55 8.05,13.85 9.882,15.682 33.561,15.682 34.441,16.562 37.428,16.562 LED2.4
NetLED2_2: LED2.2 LED3.4 | length 31.2
  Top Layer w0.5: LED2.2 32.902,13.336 33.986,14.42 60.075,14.42 62.206,16.551 LED3.4
NetLED3_2: LED3.2 LED4.4 | length 31.4
  Top Layer w0.5: LED3.2 60.495,13.251 61.976,14.732 85.48,14.732 86.917,16.169 86.917,16.313 87.24,16.636 LED4.4
NetLED4_2: LED4.2 LED5.4 | length 31.4
  Top Layer w0.5: LED4.2 85.801,13.336 86.286,13.821 86.286,13.995 86.581,14.29 86.755,14.29 87.832,15.367 108.129,15.367 108.444,15.682 108.618,15.682 108.913,15.977 108.913,16.02 109.206,16.313 112.236,16.313 LED5.4
NetLED5_2: LED5.2 LED6.4 | length 31.2
  Top Layer w0.5: LED5.2 110.11,13.336 111.962,15.188 133.016,15.188 134.464,16.636 LED6.4
NetLED6_2: LED6.2 LED7.4 | length 31.3
  Top Layer w0.5: LED6.2 135.256,13.336 137.287,15.367 158.214,15.367 159.483,16.636 LED7.4
NetLED7_2: LED7.2 LED8.4 | length 31.3
  Top Layer w0.254: LED7.2 160.731,13.336 163.2,15.805 183.497,15.805 184.328,16.636 LED8.4
NetR4_2: R4.2 R5.1 | length 4.5
  Bottom Layer w0.254: R4.2 19.86,6.326 21.985,4.201 21.985,3.899 22.558,3.326 R5.1
P0.02/AIN0: TEMP.2 U1.40 | length 29.6
  Top Layer w0.15: U1.40 204.658,16.926 205.057,17.326 205.057,21.049
  Top Layer w0.2: v2@186.69,23.495 202.956,23.495 205.057,21.394 205.057,21.049
  Top Layer w0.254: v2(186.563,23.368) v2@186.69,23.495
  Bottom Layer w0.254: TEMP.2 186.497,23.434 v2(186.563,23.368)
P0.03/AIN1: R7.1 U1.39 | length 7.5
  Top Layer w0.152: U1.39 205.058,16.9 205.358,17.201 205.358,23.645 R7.1
P0.04/AIN2: U1.4
P0.05/AIN3: U1.5
P0.07: U1.6
P0.08: INDICLED.4 U1.7 | length 204.2
  Top Layer w0.152: v2@192.786,13.232 196.31,13.225 200.183,13.225 200.231,13.274 U1.7
  Bottom Layer w0.254: INDICLED.4 14.163,4.145 13.482,3.464 13.482,1.887 14.734,0.635 192.191,0.635 194.056,2.5 194.056,3.499 193.958,3.598 193.585,3.97 193.585,4.812 194.056,5.283 194.056,11.938 v2(192.786,13.208)
P0.09/NFC1: U1.29
P0.10/NFC2: U1.30
P0.11: U1.10
P0.12: IC1.2 U1.11 | length 14.7
  Top Layer w0.152: 196.583,12.016 199.807,12.016 200.148,11.674 U1.11
  Top Layer w0.2: IC1.2 189.545,5.094 190.465,5.094 193.345,7.974 193.345,8.981 196.146,11.781 196.348,11.781 196.583,12.016
P0.13: U1.13
P0.14: U1.14
P0.17: U1.15
P0.18/RESET: "SWD PORT.10" U1.16 | length 56.3
  Top Layer w0.15: 202.057,7.747 202.057,9.758 202.145,9.846 202.414,9.846 202.636,10.067 202.636,10.167 202.648,10.179 202.648,10.439 U1.16
  Top Layer w0.2: v5(192.913,5.969) 192.913,6.223 194.437,7.747 202.057,7.747
  Bottom Layer w0.254: 151.003,4.146 151.003,3.936 151.256,3.683 185.928,3.683 188.214,5.969 v5(192.913,5.969)
P0.19: U1.18
P0.20: U1.19
P0.21: U1.20
P0.22: U1.21
P0.23: U1.22
P0.24: U1.23
P0.28/AIN4: U1.41
P0.29/AIN5: U1.42
P0.30/AIN6: U1.43
P0.31/AIN7: U1.44
P1.00: U1.24
P1.08: U1.8
P1.09: U1.9
P1.15: U1.38
RF: C18.2 L2.2 R6.1 | length 2.7
  Top Layer w0.4: 211.745,13.574 C18.2 213.865,13.574 R6.1
  Top Layer w0.8: 211.193,13.574 211.745,13.574
SWDCLK: "SWD PORT.04" DP2.1 U1.27 | length 73.9
  Top Layer w0.152: U1.27 206.692,12.065 207.645,12.065 208.026,11.684 208.026,7.366
  Top Layer w0.254: DP2.1 167.462,2.667 v2(164.973,2.667) 164.973,2.413 166.116,1.27 193.635,1.27 194.524,2.159 203.178,2.159 208.026,7.007 208.026,7.366
  Bottom Layer w0.254: 147.193,4.146 147.193,3.326 147.446,3.073 147.553,3.073 147.702,2.924 147.702,2.788 147.925,2.565 164.871,2.565 v2(164.973,2.667)
SWDIO: "SWD PORT.02" DP1.1 U1.26 | length 72.5
  Top Layer w0.152: U1.26 206.692,11.665 207.053,11.665 207.287,11.431 207.287,9.929 207.485,9.731 207.485,8.222 207.391,8.128 207.391,7.62
  Top Layer w0.254: v2(192.278,2.794) 192.405,2.921 195.874,2.921 197.783,4.83 197.783,5.203 199.693,7.112 207.242,7.112 207.391,7.261 207.391,7.62
  Bottom Layer w0.254: 145.923,4.146 145.923,1.778 146.431,1.27 175.006,1.27 ; DP1.1 175.006,1.27 ; v2(192.278,2.794) 190.754,1.27 175.006,1.27
VCC: C16.1 CT.1 IC1.14 J1.A9 J1.B9 LED1.1 LED2.1 LED3.1 LED4.1 LED5.1 LED6.1 LED7.1 LED8.1 R4.1 TEMP.1 TLV761.3 | length 278.7
  Top Layer w0.254: v2(5.842,17.653) 6.56,16.935 7.265,16.935 LED1.1 ; v2(29.845,17.272) 30.481,16.636 LED2.1 ; v2(55.88,17.526) 56.598,16.808 57.349,16.808 LED3.1 ; v2(80.772,18.034) 80.942,18.034 82.34,16.636 LED4.1 ; v2(105.283,17.526) 106.469,17.526 107.359,16.636 LED5.1 ; v2(130.048,17.399) 130.323,17.399 130.763,16.959 132.228,16.959 LED6.1 ; v2(154.94,17.526) 155.83,16.636 LED7.1 ; v2(179.832,17.526) 181.399,17.526 182.289,16.636 LED8.1 ; 180.467,4.445 180.512,4.4
  Top Layer w0.4: 180.512,4.4 IC1.14
  Top Layer w0.5: v2(178.816,13.462) 178.816,8.358 180.467,6.707 180.467,4.445
  Bottom Layer w0.254: v2(5.842,17.653) 6.858,16.637 13.97,16.637 15.822,18.489 18.62,18.489 ; TLV761.3 44.983,25.447 45.389,25.041 45.833,25.041 46.239,24.636 46.239,21.07 45.974,20.805 45.974,17.953 46.455,17.472 46.594,17.472 46.863,17.203 C16.1 46.863,17.103 48.091,15.875 52.324,15.875 53.975,17.526 v2(55.88,17.526) 56.155,17.526 56.663,18.034 v2(80.772,18.034) 96.52,18.034 97.79,19.304 v2(97.79,20.828) 101.981,20.828 v2(105.283,17.526) 105.346,17.462 129.984,17.462 v2(130.048,17.399) 130.112,17.462 154.876,17.462 v2(154.94,17.526) 174.371,17.526 ; v2(178.816,13.462) 179.832,14.478 v2(179.832,17.526) 174.371,17.526 ; TEMP.1 179.506,25.334 178.264,26.576 176.751,26.576 CT.1 176.055,26.576 175.816,26.576 173.863,24.623 173.863,18.034 174.371,17.526
  Bottom Layer w0.4: v2(29.845,17.272) 30.861,16.256 45.966,16.256 C16.1
  Bottom Layer w0.5: 18.546,18.564 18.62,18.489 18.695,18.415 21.735,18.415 ; 21.586,18.564 21.735,18.415 ; v2(29.845,17.272) 27.813,17.272 26.67,18.415 21.735,18.415
  Bottom Layer w0.6: R4.1 19.741,3.326 20.141,2.926 20.141,2.134 20.493,1.783 24.668,1.783 25.019,2.134 25.019,10.795 29.845,15.621 v2(29.845,17.272)
  Bottom Layer w0.8: 18.546,18.564 J1.B9 ; 21.586,18.564 J1.A9
VDD_nRF: "SWD PORT.01" C6.1 C7.1 C8.1 C12.1 C13.1 C17.1 DP3.1 R3.1 TLV761.2 TLV761.4 U1.12 U1.17 U1.25 U1.37 U1.48 | length 390.9
  Top Layer w0.2: v1@199.028,11.274 U1.12 ; U1.17 203.058,9.924 202.76,9.626 202.76,9.362 C7.1 v1@203.22,9.359 ; U1.37 205.858,16.811 206.06,17.014 206.06,17.686 C12.1 206.699,17.689 v1(206.715,17.673) ; v1(206.405,9.274) 206.508,9.274 206.593,9.359 C8.1 207.053,9.362 207.053,9.626 206.683,9.997 U1.25
  Top Layer w0.25: C13.1@200.134,17.823 U1.48
  Top Layer w0.254: v2(165.862,20.701) 165.989,20.828 171.069,20.828 v2(171.196,20.955)
  Top Layer w0.5: v2(192.448,17.823) v4(199.408,17.823) C13.1@200.134,17.823
  Top Layer w1.2: v2(171.196,20.955) 189.315,20.955 v2(192.448,17.823)
  Bottom Layer w0.254: R3.1 28.706,2.31 29.238,1.778 41.246,1.778 48.612,9.144 105.004,9.144 105.029,9.119 145.67,9.119 145.923,8.866 145.923,8.046 145.923,7.226 146.432,6.717 146.432,6.688 146.655,6.465 171.196,6.465 ; DP3.1 171.196,6.465 ; v2(192.448,17.823) 189.103,14.478 189.103,10.563 185.005,6.465 171.196,6.465
  Bottom Layer w0.3: v1(206.405,9.274) 200.817,9.274 v1(198.817,11.274) 198.817,17.232 v4(199.408,17.823) 200.909,17.823 201.51,17.222 201.51,17.214 201.864,16.86 205.902,16.86 v1(206.715,17.673)
  Bottom Layer w0.4: TLV761.2 44.708,24.278 44.051,24.278 43.654,24.675 43.654,26.966 43.92,27.232 48.054,27.232 50.042,25.244 50.608,25.244 51.283,24.569 TLV761.4 50.865,23.585 50.865,18.607 49.369,17.111 48.31,17.111 C17.1
  Bottom Layer w1.5: TLV761.4 168.148,24.003 v2(171.196,20.955)
  other v1: 105.029,9.144 203.408,9.274
XC1: C1.1 U1.35 X1.1 | length 8.1
  Top Layer w0.15: U1.35 207.092,15.274 207.703,15.886 209.585,15.886 209.59,15.891 211.019,15.891 211.163,16.035 211.163,16.919 210.775,17.307 210.7,17.307 210.608,17.399 210.583,17.399 210.258,17.724 210.258,17.749 X1.1 209.743,18.189 C1.1
XC2: C2.1 U1.36 X1.3 | length 3.5
  Top Layer w0.15: U1.36 206.908,15.674 207.483,16.249 208.383,16.249 X1.3 208.443,16.889 C2.1
pads on no net: "SWD PORT.06" "SWD PORT.07" "SWD PORT.08" C4.33 IC1.4 IC1.5 IC1.6 IC1.8 IC1.9 IC1.10 IC1.11 IC1.12 IC1.13 LED8.2 U1.2 U1.3 U1.28
copper on no net: | length 30.6
  Top Layer w0.254: 216.413,13.653 222.14,13.653 222.14,11.435 219.197,11.435 219.197,9.378 222.14,9.378 222.14,7.397 219.171,7.397 219.171,5.441 222.14,5.441 222.14,3.561 219.176,3.561

## Polygon pours and split planes (outlines as drawn)
GND on Bottom Layer "Bottom_Layer-GND" (solid, remove dead copper, pour order 1001): 2.1,30.065 2.1,0.065 216.476,0.065 216.476,30.065
VCC on Bottom Layer "NONET_L-01_P-001" (solid, pour order 1003): 4.953,18.669 4.953,11.904 188.434,11.904 188.595,12.065 188.595,19.177 54.102,19.177 51.181,16.256 42.164,16.256 39.751,18.669
GND on Bottom Layer "NONET_L-01_P-001" (solid, pour order 1004): 44.702,19.646 44.702,22.225 42.926,22.225 42.926,19.646
GND on Bottom Layer "NONET_L-01_P-001" (solid, pour order 1002): 179.705,24.198 177.419,25.674 175.895,25.674 175.895,22.733 176.784,21.844 179.705,21.844
GND on Top Layer "Top_Layer-GND" (solid, remove dead copper, pour order 1000): 2.095,30 2.095,0 216.408,0 216.408,30

## Keep-outs
Keep-Out Layer:
  the board outline again, w0.254

## Other copper
Top Layer:
  rectangle net RF: 211.483,13.174 212.008,13.974
  pour cut-out: 210.912,19.003 207.333,19.003 207.333,15.749 210.912,15.749
  pour cut-out: 207.783,14.465 209.458,14.465 209.458,13.999 209.558,13.999 209.558,12.949 207.783,12.949

## Silkscreen, mask and mechanical layers (free items; w line width, h text height)
Top Overlay:
  text "VDD_nRF" at 160.909,21.884 h1
  text "VCC" at 98.552,20.828 h1
  text "TGosman Thermometre Rev A" at 79.629,4.699 h1.52